# Altium PCB PCB_all.PcbDoc (part 3 of 5)
Units mm, origin at the board's own origin, x right, y up, seen from the top; angles counter-clockwise.
Board outline 345 x 232.5 mm, 2 copper layers (Top Layer, Bottom Layer); 484 components, 419 nets, 1569 pads, 736 vias.
Unrouted connection lines stored in the file: 51.
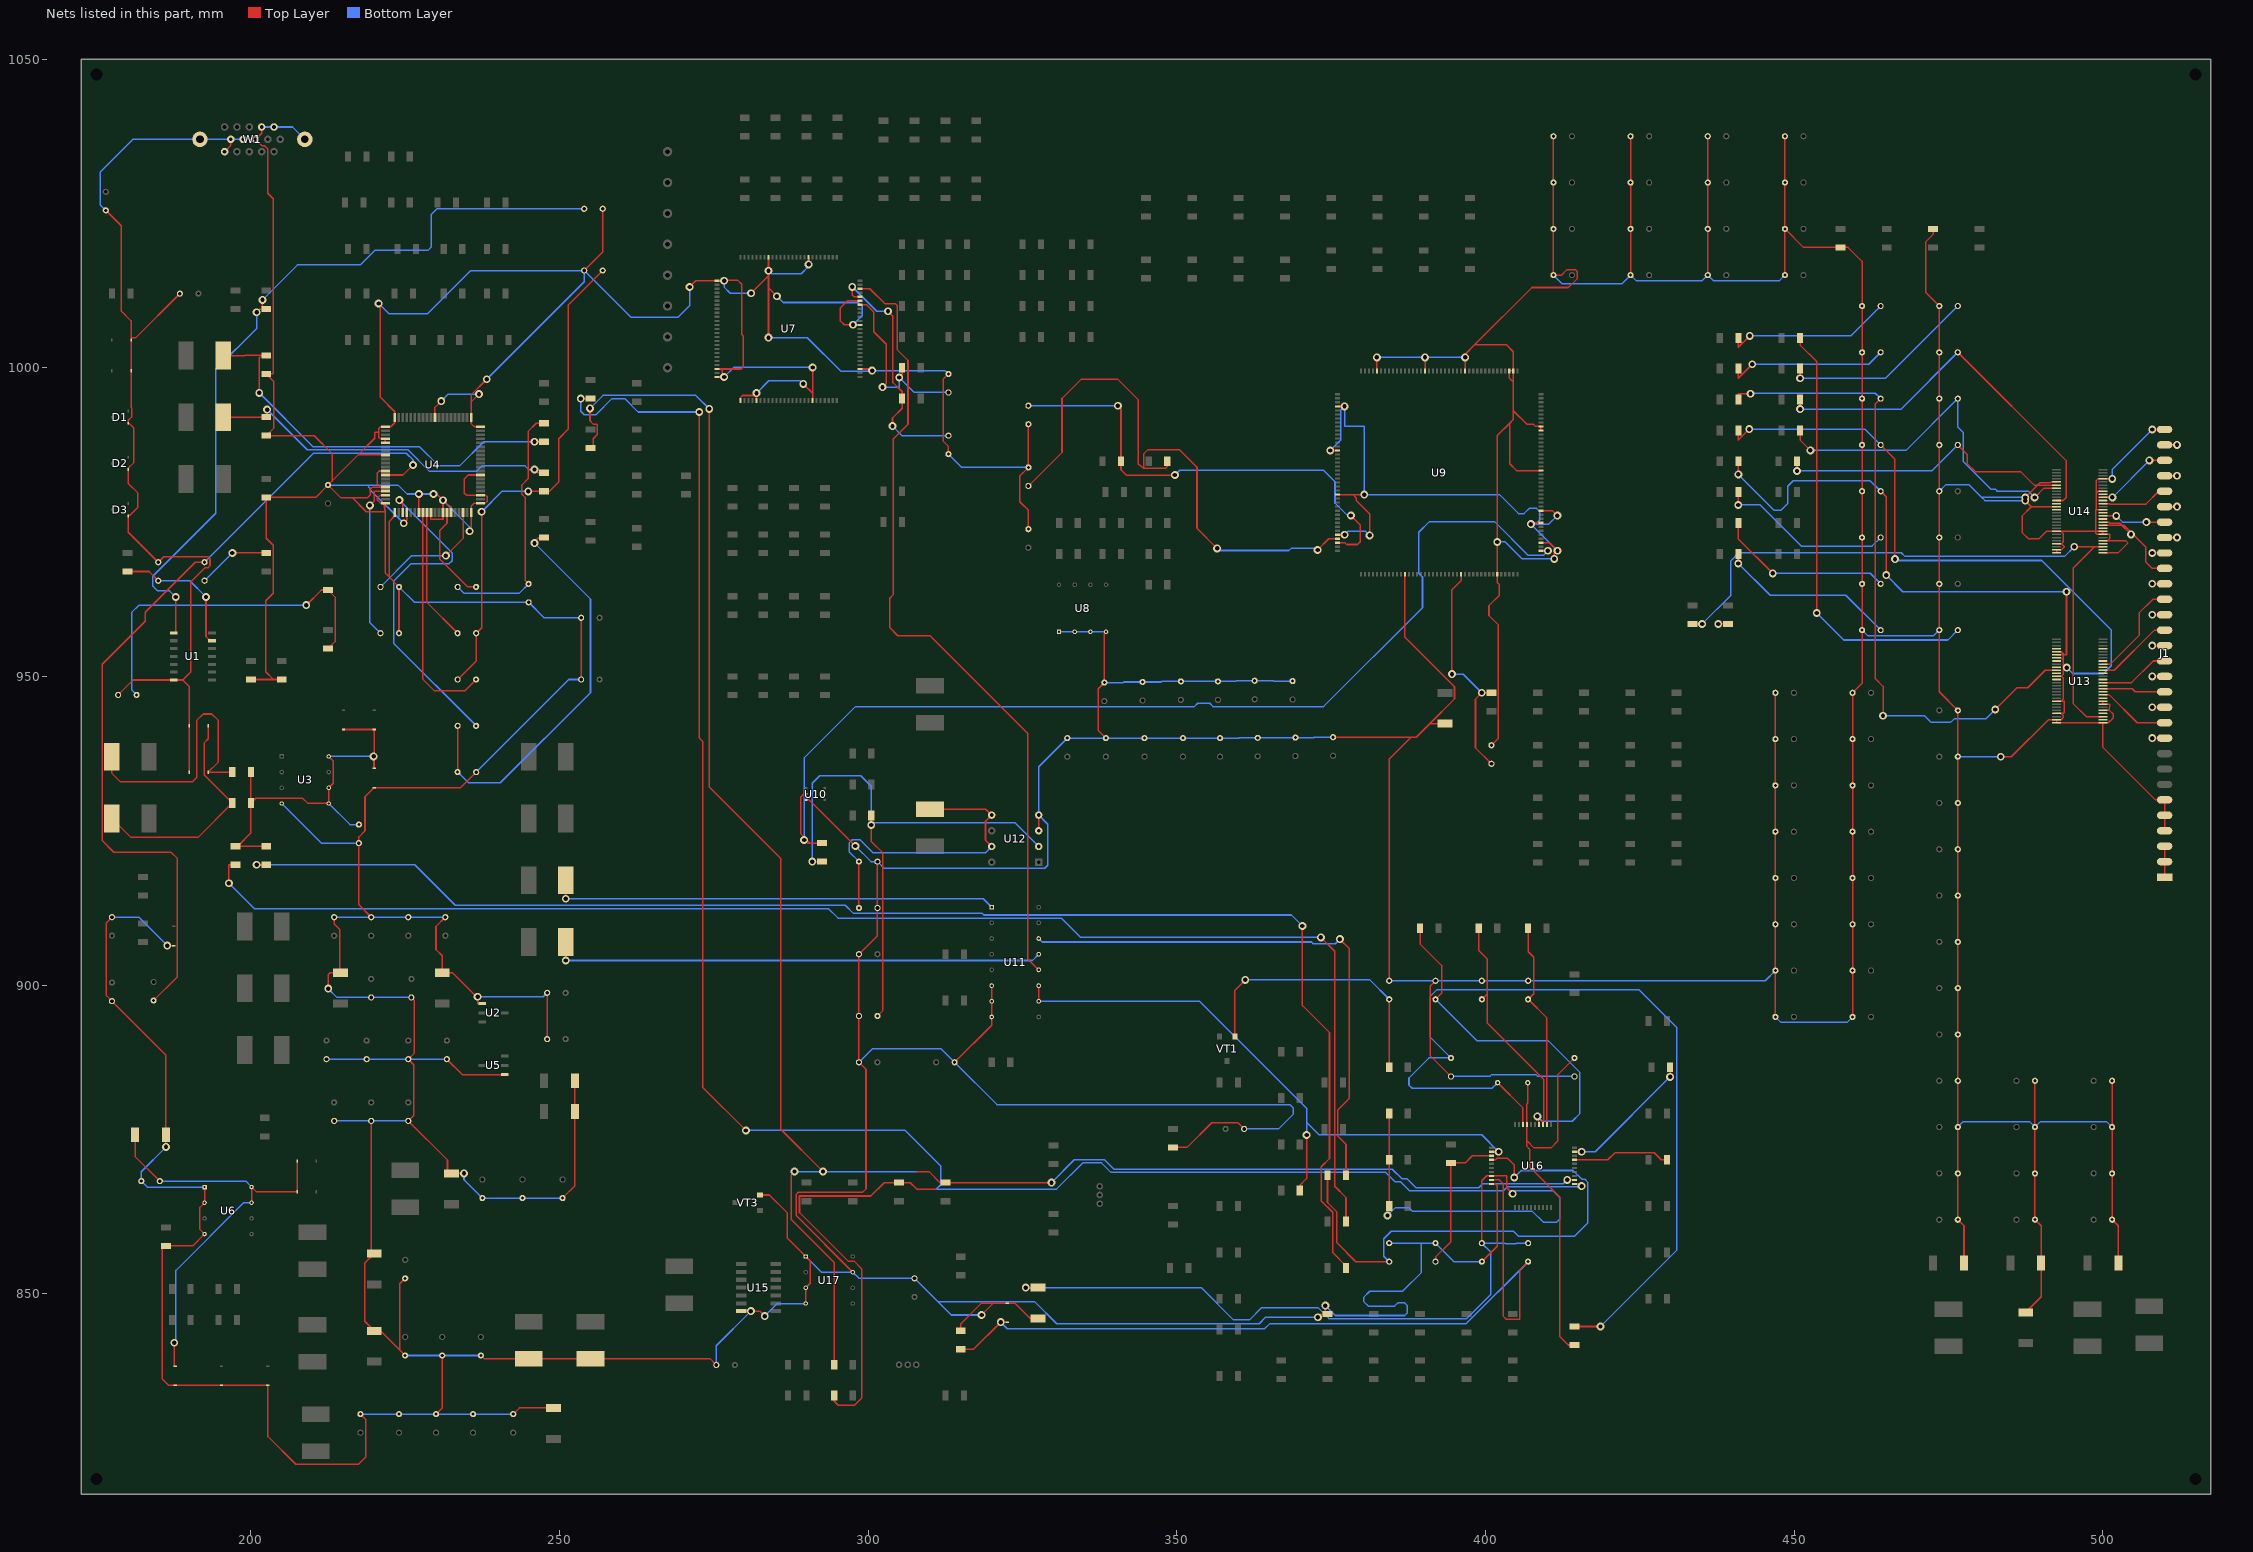
[diagram p3: the nets of this part, all layers, seen from the top]

## Via types
v1: diameter 1.27, hole 0.711, Top Layer to Bottom Layer, 736 vias

## Nets (pads, with @x,y where several pads share a name; then routed paths per layer and width w, separated by ;. In a path a pad name is that pad's centre, name@x,y a point inside that pad or via, vN(x,y) a via of type N, cw(c..) or ccw(c..) an arc to the next point about the centre after c; other vN are vias at no path point) (continued)
GA3: C120.2 R149.1 U14.6 | length 48.9
  Top Layer w0.25: v1(450.444,983.285) 450.45,983.291 R149.1@450.45,984.85 ; C120.2@476.5,987.5 478.003,985.997 478.003,984.504 479.323,983.183 486.664,983.183 488.847,981 U14.6@492.5,981
  Bottom Layer w0.25: v1(450.444,983.285) 472.285,983.285 C120.2@476.5,987.5
GA4: C118.2 R148.1 U14.7 | length 60
  Top Layer w0.25: R148.1@450.95,989.85 450.95,988.29 v1(452.628,986.612) ; v1(488.95,978.992) 490.474,980.516 491.566,980.516 491.582,980.5 U14.7@492.5,980.5
  Bottom Layer w0.25: v1(452.628,986.612) 468.112,986.612 C118.2@476.5,995 476.5,990.385 477.393,989.492 477.393,984.81 481.895,980.308 482.603,980.308 482.905,980.006 487.936,980.006 v1(488.95,978.992)
GA5: C115.2 R147.1 U14.11 | length 63.5
  Top Layer w0.25: v1(450.95,993.292) R147.1@450.95,994.85 ; C115.2@476.5,1002.5 494.102,984.898 494.102,979.029 493.573,978.5 U14.11@492.5,978.5
  Bottom Layer w0.25: v1(450.95,993.292) 467.292,993.292 C115.2@476.5,1002.5
GA6: C112.2 R146.1 U14.12 | length 32
  Top Layer w0.25: v1(450.95,998.296) R146.1@450.95,999.85
  Bottom Layer w0.25: v1(450.95,998.296) 464.796,998.296 C112.2@476.5,1010
GA7: C109.2 R145.1 U14.14 | length 71
  Top Layer w0.25: R145.1@450.95,1004.85 450.95,1003.706 453.644,1001.012 v1(453.644,960.272)
  Bottom Layer w0.25: v1(453.644,960.272) 458.013,955.904 474.904,955.904 C109.2@476.5,957.5
GB0: C106.2 R144.1 U13.8 | length 29.1
  Top Layer w0.25: v1(440.944,968.299) 440.95,968.305 R144.1@440.95,969.85
  Bottom Layer w0.25: v1(440.944,968.299) 446.1,963.143 458.357,963.143 C106.2@464,957.5
GB1: C103.2 R143.1 U13.10 | length 28.6
  Top Layer w0.25: R143.1@440.95,974.85 440.95,972.267 v1(446.519,966.699)
  Bottom Layer w0.25: v1(446.519,966.699) 462.301,966.699 C103.2@464,965
GB2: C100.2 R142.1 U13.4 | length 28.5
  Top Layer w0.25: v1(440.944,977.773) 440.95,977.779 R142.1@440.95,979.85
  Bottom Layer w0.25: v1(440.944,977.773) 444.5,977.773 451.155,971.118 462.618,971.118 C100.2@464,972.5
GB3: C96.2 R141.1 U13.6 | length 88
  Top Layer w0.25: v1(440.95,982.72) R141.1@440.95,984.85 ; C96.2@464,980 464.896,979.104 v1(464.896,966.419) ; U13.6@492.5,953.5 494.106,953.5 v1(494.106,963.727)
  Bottom Layer w0.25: v1(440.95,982.72) 446.786,976.884 447.802,976.884 448.945,978.027 448.945,980.796 449.859,981.71 462.29,981.71 C96.2@464,980 ; v1(464.896,966.419) 467.589,963.727 v1(494.106,963.727)
GB4: C92.2 R140.1 U13.7 | length 102.3
  Top Layer w0.25: R140.1@440.95,989.85 440.95,988.295 v1(442.722,990.067) ; C92.2@464,987.5 466.319,985.181 v1(466.319,969.01) ; U13.7@492.5,953 493.268,953 493.598,952.67 493.598,951.992 v1(494.157,951.433)
  Bottom Layer w0.25: v1(442.722,990.067) 461.433,990.067 C92.2@464,987.5 ; v1(466.319,969.01) 466.547,968.781 490.093,968.781 501.371,957.504 501.371,951.713 500.132,950.474 495.116,950.474 v1(494.157,951.433)
GB5: C87.2 R139.1 U13.11 | length 108.7
  Top Layer w0.25: R139.1@440.95,994.85 440.95,995.782 v1(442.925,995.782) ; C87.2@464,995 463.118,994.118 463.118,949.655 464.388,948.385 v1(464.388,943.635) ; v1(482.564,944.641) 486.1,948.177 487.843,948.177 490.666,951 U13.11@492.5,951
  Bottom Layer w0.25: v1(442.925,995.782) 443.027,995.883 463.117,995.883 C87.2@464,995 ; v1(464.388,943.635) 471.094,943.635 472.117,942.613 475.387,942.613 475.891,943.117 481.04,943.117 v1(482.564,944.641)
GB6: C83.2 R138.1 U13.12 | length 26.3
  Top Layer w0.25: R138.1@440.95,999.85 440.95,998.302 v1(443.205,1000.557)
  Bottom Layer w0.25: v1(443.205,1000.557) 462.057,1000.557 C83.2@464,1002.5
GB7: C79.2 R137.1 U13.14 | length 27.4
  Top Layer w0.25: R137.1@440.95,1004.85 440.95,1003.306 v1(442.798,1005.154)
  Bottom Layer w0.25: v1(442.798,1005.154) 459.154,1005.154 C79.2@464,1010
GND: C1.2 C2.2 C3.2 C4.2 C5.2 C6.2 C7.2 C8.2 C9.2 C10.2 C11.2 C12.2 C13.2 C14.2 C15.2 C17.2 C18.2 C19.2 C25.1 C26.2 C27.1 C28.2 C29.1 C30.2 C31.2 C32.2 C33.2 C34.2 C35.2 C36.2 C37.2 C38.2 C39.2 C40.2 C41.2 C42.2 C43.2 C44.1 C45.1 C46.1 C47.1 C48.1 C49.1 C50.1 C51.1 C52.2 C53.1 C54.1 C55.1 C56.1 C57.2 C58.1 C59.1 C60.1 C61.1 C62.1 C63.1 C64.2 C65.1 C66.1 C67.1 C68.1 C69.1 C70.1 C71.1 C72.1 C73.1 C74.1 C75.1 C76.1 C77.1 C78.1 C79.1 C80.1 C81.1 C82.1 C83.1 C84.1 C85.1 C86.1 C87.1 C88.1 C89.1 C90.1 C91.1 C92.1 C93.1 C94.1 C95.1 C96.1 C97.1 C98.1 C99.1 C100.1 C101.1 C102.1 C103.1 C104.1 C105.1 C106.1 C107.1 C108.1 C109.1 C110.1 C111.1 C112.1 C113.1 C114.1 C115.1 C116.1 C117.1 C118.1 C119.1 C120.1 C121.1 C122.1 C123.1 C124.1 C125.1 C126.1 C127.1 C128.2 C129.2 C130.1 C131.2 C132.2 C133.2 C134.2 C135.2 C136.2 C137.2 C138.1 C139.1 C140.1 C141.1 C142.1 C143.1 C144.1 C145.1 C146.1 C147.1 C148.1 C149.1 C150.1 C151.1 C152.1 C153.1 C154.1 C155.1 C156.1 C157.1 C158.2 C159.1 C160.2 C161.2 C162.1 C163.2 C164.2 C165.1 C166.2 C168.2 C169.2 C170.2 C171.2 C172.1 D1.1 D2.1 D3.1 D8.1 J1.4 J1.5 J1.6 J1.30 L16.1 L17.1 R3.1 R5.1 R15.1 R16.1 R17.1 R49.1 R178.1 R180.1 R204.1 R205.1 R218.1 U1.7 U2.1 U3.4 U4.1 U4.10 U4.20 U4.21 U4.24 U4.25 U4.28 U4.32 U4.36 U4.38 U4.40 U4.41 U4.44 U4.47 U4.50 U4.53 U4.55 U4.60 U4.61 U4.63 U4.68 U4.80 U5.1 U6.1 U6.2 U6.4 U7.1 U7.5 U7.19 U7.28 U7.39 U7.45 U7.58 U7.68 U7.76 U7.98 U7.100 U8.1 U8.2 U8.3 U8.4 U9.12 U9.35 U9.43 U9.48 U9.51 U9.61 U9.71 U9.72 U9.82 U9.83 U9.94 U9.104 U9.116 U9.124 U9.135 U9.146 U9.156 U10.3 U11.6 U11.7 U11.8 U12.3 U12.4 U13.5 U13.13 U13.21 U13.25 U13.27 U13.28 U13.29 U13.33 U13.35 U13.36 U13.43 U13.49 U13.53 U14.5 U14.13 U14.21 U14.25 U14.27 U14.28 U14.29 U14.33 U14.35 U14.36 U14.43 U14.49 U14.53 U15.7 U16.20 U17.1 U17.3 U17.4 U17.7 VT3.2 W1.4 W1.5 W1.6 W1.7 W1.8 W1.11 W1.16 W1.17 ZD1.1 ZD2.1 ZD3.1 ZD4.1 ZD5.1 ZD6.1 ZD7.1 ZD8.1 ZD9.1 | length 3242.3
  Top Layer w0.25: C172.1@176.5,1025.5 178.994,1023.006 178.994,1009.193 180.6,1007.587 180.6,1004.824 ; C5.2@177.5,911 176.606,910.106 176.606,898.294 C13.2@177.5,897.4 186.25,888.65 C52.2@186.25,875.75 186.25,873.794 v1(186.258,873.785) ; C11.2@178.5,947 180.92,949.42 U1.7@187.5,949.42 188.976,949.42 ; v1(186.461,906.399) v1(186.461,906.399) ZD4.1@187.5,906.4 ; C10.2@188.5,1012 181.324,1004.824 180.6,1004.824 ; ZD3.1@190,934.5 ZD5.1@190,942 190,948.396 188.976,949.42 ; U6.1@192.5,867.29 U6.2@192.5,864.75 191.745,863.995 191.745,860.425 U6.4@192.5,859.67 190.58,857.75 R49.1@186.25,857.75 185.674,857.75 185.674,836.168 186.692,835.15 ZD9.1@187.75,835.15 ZD8.1@195.25,835.15 ZD7.1@202.75,835.15 202.768,835.15 202.768,826.872 207.264,822.376 217.424,822.376 218.643,823.595 218.643,829.607 C54.1@217.75,830.5 ; W1.11@195.75,1035 196.75,1036 W1.6@196.75,1037 ; R3.1@200,949.5 203.66,949.5 ; W1.4@201.75,1039 201.75,1038 W1.8@200.75,1037 201.76,1035.99 202.184,1035.99 202.743,1035.431 202.743,1028.268 203.632,1027.379 203.632,999 R15.1@202.5,999 203.68,997.82 203.68,990.18 R16.1@202.5,989 210.261,989 213.157,986.104 213.157,981.657 ; R5.1@205,949.5 203.66,949.5 ; v1(212.547,899.422) 212.547,901.7 212.847,902 C14.2@214.401,902 ; C1.2@213.5,911 213.5,909.917 214.401,909.015 C14.2@214.401,902 ; C14.2@214.5,902 C14.2@214.401,902 ; C28.2@219.5,878 219.5,856.5 C41.2@220,856.5 218.465,854.965 218.465,845.535 C42.2@220,844 221,844 224.104,840.896 ; C2.2@219.5,911 217.5,913 C15.2@217.5,923 217.5,924.001 218.491,924.992 218.491,930.491 ZD6.1@220,932 234,932 C19.2@236.5,934.5 ; v1(220.701,1010.412) 220.98,1010.133 220.98,995.231 223.325,992.886 U4.20@223.325,991.972 223.325,991.108 222.642,990.425 U4.21@221.778,990.425 220.98,990.425 220.701,990.146 220.701,989.584 ; U4.40@221.778,978.075 U4.40@221.564,978.075 ; U4.38@221.778,979.375 220.98,979.375 220.472,978.867 220.472,978.583 220.98,978.075 U4.40@221.564,978.075 ; U4.36@221.778,980.675 220.98,980.675 ; U4.32@221.778,983.275 220.792,983.275 220.472,982.955 220.472,981.183 220.98,980.675 ; U4.28@221.778,985.875 217.375,985.875 ; U4.25@221.778,987.825 U4.24@221.778,988.475 220.98,988.475 220.701,988.754 220.701,989.584 ; U4.41@223.325,976.528 223.325,976.02 222.453,975.149 222.453,966.047 ; C29.1@224,957 C27.1@224,964.5 222.453,966.047 ; v1(224.765,974.801) 225.275,975.312 U4.44@225.275,976.528 ; C45.1@225,840 224.104,840.896 ; C44.1@225,852.5 224.104,851.604 224.104,840.896 ; C9.2@226,898 226.492,897.508 226.492,888.992 C32.2@225.5,888 226.39,887.11 226.39,878.89 C26.2@225.5,878 231.851,871.649 231.851,869.5 C57.2@232.5,869.5 v1(234.523,869.5) ; U4.47@227.225,976.528 v1(227.225,979.551) ; U4.50@229.175,976.528 229.175,975.436 231.06,975.436 231.125,975.501 U4.53@231.125,976.528 v1(231.125,978.532) ; v1(229.591,979.551) 230.106,979.551 v1(231.125,978.532) ; U4.10@229.825,991.972 229.825,993.578 v1(230.835,994.588) ; C51.1@230,830.5 231,831.5 C47.1@231,840 ; C4.2@231.5,911 229.99,909.49 229.99,905.746 231,904.736 C6.2@231,902 232.664,902 v1@236.728,897.936 ; C31.2@231.75,888 234.25,885.5 U5.1@241.1,885.5 ; U4.55@232.425,976.528 232.425,977.504 231.645,978.012 v1(231.125,978.532) ; v1(235.436,973.506) 235.675,973.745 U4.60@235.675,976.528 235.675,977.57 236.18,978.075 U4.61@237.222,978.075 237.998,978.075 238.281,978.358 238.281,979.092 237.998,979.375 U4.63@237.222,979.375 234.874,979.375 234.571,979.678 234.571,981.991 235.205,982.625 U4.68@237.222,982.625 ; v1(236.728,898.119) v1@236.728,897.936 ; v1(236.957,995.731) 235.675,994.449 ; U4.80@237.222,990.425 236.22,990.425 235.675,990.97 U4.1@235.675,991.972 235.675,994.449 ; C50.1@237.25,840 237.75,839.5 L16.1@245,839.5 L17.1@255,839.5 274.36,839.5 C158.2@275.4,838.46 ; U2.1@237.5,897 236.728,897 v1@236.728,897.936 ; v1(238.215,998.144) 235.675,995.604 235.675,994.449 ; C46.1@242.5,830.5 243.5,831.5 C43.2@249,831.5 ; C38.2@248,891.25 C36.2@248,898.75 ; C60.1@250.5,865.5 252.5,867.5 C35.2@252.5,879.5 C40.2@252.5,884.5 ; C39.2@253.5,949.5 C37.2@253.5,959.5 ; C18.2@254,1015.75 257,1018.75 C8.2@257,1025.75 ; v1(271.064,1013.084) 272.08,1014.1 U7.76@275.5,1014.1 v1@276.657,1014.1 ; U7.100@275.5,998.5 275.921,998.5 ; U7.98@275.5,999.8 276.093,999.8 ; v1(276.657,998.499) 275.921,998.5 ; v1(276.657,1014.095) v1@276.657,1014.1 ; U7.1@279.3,994.7 279.3,995.172 279.636,995.508 v1@281.9,995.508 ; U15.7@279.4,847.19 v1@280.999,847.19 ; v1(281,847.192) v1@280.999,847.19 ; v1(281.026,1012.063) 283.85,1014.887 ; U7.5@281.9,994.7 v1@281.9,995.508 ; v1(281.9,995.883) v1@281.9,995.508 ; VT3.2@282.5,866 283.985,866 286.922,863.063 286.922,858.998 U17.1@289.88,856.04 290.627,855.293 290.627,851.707 U17.3@289.88,850.96 U17.4@289.88,848.42 ; v1(283.246,846.388) 282.444,847.19 v1@280.999,847.19 ; v1(283.85,1004.875) 283.85,1012.947 ; U7.68@283.85,1017.9 283.85,1016.514 v1(283.85,1015.721) 283.85,1014.887 ; v1(285.215,1011.582) 283.85,1012.947 ; v1(289.476,997.384) 291,995.86 ; U10.3@290,930 290.445,930 v1(297.917,922.528) ; v1(290.347,1016.737) 290.35,1016.739 U7.58@290.35,1017.9 ; U7.19@291,994.7 291,995.86 ; v1(291,1000.049) 291,995.86 ; U17.7@297.5,853.5 288.371,862.629 288.371,866.14 288.67,866.439 299.094,866.439 299.644,866.989 299.644,886.356 C128.2@298.5,887.5 C129.2@298.5,895 C131.2@298.5,905 301.5,908 C132.2@301.5,912.5 C133.2@301.5,920 ; v1(297.536,1006.958) v1@297.543,1006.95 ; U7.28@298.7,999.8 300.379,999.8 v1(300.636,999.543) v1@300.53,999.436 ; U7.39@298.7,1006.95 v1@297.543,1006.95 ; U7.45@298.7,1010.85 296.642,1010.85 295.508,1009.716 295.508,1007.553 296.111,1006.95 v1@297.543,1006.95 ; C55.1@313,986 313,987.242 312.121,988.121 312.121,998.121 C56.1@313,999 ; C130.1@314,887.5 320,893.5 U11.8@320,894.84 U11.7@320,897.38 U11.6@320,899.92 ; R205.1@315,844 314.985,844 314.985,845.122 318.364,848.5 320.3,848.5 ; v1(318.364,846.564) 320.3,848.5 ; C62.1@325.95,973.85 325.95,976.918 324.567,978.301 324.567,982.467 C61.1@325.95,983.85 C63.1@325.95,990.85 ; C163.2@327.5,846 326.248,846 323.748,848.5 D8.1@322.5,848.5 320.3,848.5 ; U12.3@327.62,925 U12.4@327.62,927.54 ; C73.1@338.5,940 337.261,941.239 337.261,948.011 C98.1@338.25,949 338.25,956.95 U8.4@338.53,957.23 ; R218.1@349.4,873.7 351.638,873.7 355.635,877.697 359.903,877.697 C169.2@360.9,876.7 ; v1(372.847,846.192) 373.355,846.7 R204.1@374.066,846.7 ; v1(374.066,848.076) R204.1@374.066,846.7 ; R204.1@374.4,846.7 R204.1@374.066,846.7 ; v1(374.838,986.6) U9.135@376,986.6 ; C65.1@375.3,940.15 377.5,940.15 387.944,940.15 ; U9.156@376,972.95 v1(377.165,972.95) ; U9.146@376,979.45 378.532,979.45 ; U9.124@376,993.75 v1(377.162,993.75) ; v1(380.365,979.45) 378.532,979.45 ; v1(381.229,972.845) 381.229,976.325 379.066,978.488 379.066,978.916 378.532,979.45 ; U9.116@382.4,999.5 v1(382.4,1001.676) ; C170.2@384.4,900.7 384.4,936.606 387.944,940.15 ; U9.12@386.95,966.55 386.95,956.359 394.975,948.334 394.975,946.353 390.972,942.35 ; U9.104@390.2,999.5 v1(390.2,1001.676) ; C164.2@391.9,900.7 391.008,899.808 391.008,888.592 C161.2@394.4,885.2 ; C64.2@393.45,942.35 390.972,942.35 ; U9.94@396.7,999.5 v1(396.7,1001.676) 396.7,1002.185 398.223,1003.708 ; C165.1@399.4,855.2 401.887,857.687 401.887,867.478 401.565,867.8 U16.20@400.95,867.8 ; C90.1@400.95,938.85 402.082,939.982 402.082,958.342 400.558,959.866 400.558,961.468 402.258,963.168 402.258,964.868 401.9,965.226 U9.35@401.9,966.55 v1(401.9,971.781) 401.9,989.009 403.911,991.02 ; v1(407.34,974.674) 407.566,974.9 408.127,974.9 ; 408.127,974.674 408.127,974.9 ; U9.43@408.95,971.65 410.336,971.65 411.128,970.858 v1@411.128,970.356 ; U9.48@408.95,974.9 408.127,974.9 ; U9.51@408.95,976.85 410.844,976.85 v1(411.636,976.058) ; U9.61@408.95,983.35 405.014,983.35 403.911,984.453 403.911,991.02 ; U9.71@408.95,989.85 U9.72@408.95,990.5 408.114,990.5 407.766,990.848 406.702,990.848 404.5,993.05 ; C70.1@411,1037.5 C72.1@411,1030 C74.1@411,1022.5 C76.1@411,1015 412.309,1015 413.207,1015.898 414.528,1015.898 414.884,1015.543 414.884,1014.476 413.41,1013.003 407.518,1013.003 398.223,1003.708 ; v1(411.128,969.035) v1@411.128,970.356 ; v1(411.658,970.356) v1@411.128,970.356 ; C91.1@423.5,1015 C86.1@423.5,1022.5 C82.1@423.5,1030 C78.1@423.5,1037.5 ; C105.1@436,1015 C102.1@436,1022.5 C99.1@436,1030 C95.1@436,1037.5 ; C107.1@446.95,894.85 C104.1@446.95,902.35 C101.1@446.95,909.85 C97.1@446.95,917.35 C93.1@446.95,924.85 C88.1@446.95,932.35 C84.1@446.95,939.85 C80.1@446.95,947.35 ; C117.1@448.5,1015 C114.1@448.5,1022.5 ; C108.1@448.5,1037.5 C111.1@448.5,1030 C114.1@448.5,1022.5 ; C127.1@459.45,894.85 C125.1@459.45,902.35 C123.1@459.45,909.85 C121.1@459.45,917.35 C119.1@459.45,924.85 C116.1@459.45,932.35 C113.1@459.45,939.85 C110.1@459.45,947.35 461,948.9 C106.1@461,957.5 C103.1@461,965 C100.1@461,972.5 C96.1@461,980 C92.1@461,987.5 C87.1@461,995 C83.1@461,1002.5 C79.1@461,1010 461,1017.224 458.724,1019.5 R180.1@457.5,1019.5 451.5,1019.5 C114.1@448.5,1022.5 ; R178.1@472.5,1022.5 472.5,1021.597 471.272,1020.369 471.272,1012.228 C112.1@473.5,1010 C115.1@473.5,1002.5 C118.1@473.5,995 C120.1@473.5,987.5 C122.1@473.5,980 C124.1@473.5,972.5 C126.1@473.5,965 C109.1@473.5,957.5 473.5,947.5 C157.1@476.5,944.5 C156.1@476.5,937 C155.1@476.5,929.5 C154.1@476.5,922 C153.1@476.5,914.5 C152.1@476.5,907 C151.1@476.5,899.5 C150.1@476.5,892 C147.1@476.5,884.5 C144.1@476.5,877 C141.1@476.5,869.5 C138.1@476.5,862 477.5,861 C135.2@477.5,855 ; v1(483.464,936.981) 485.17,936.981 491.189,943 U13.27@492.5,943 ; v1(487.426,978.484) 488.41,977.5 ; v1(487.426,978.992) 489.839,981.405 491.566,981.405 491.661,981.5 U14.5@492.5,981.5 ; C134.2@487.5,847 490,849.5 C136.2@490,855 490,861 C139.1@489,862 C142.1@489,869.5 C145.1@489,877 C148.1@489,884.5 ; U13.25@492.5,944 493.268,944 ; U13.21@492.5,946 493.268,946 ; U13.13@492.5,950 493.268,950 ; U13.5@492.5,954 493.268,954 493.598,953.67 493.598,950.33 493.268,950 ; U14.28@492.5,970 U14.27@492.5,970.5 493.268,970.5 493.741,970.973 493.741,971.042 493.283,971.5 ; U14.25@492.5,971.5 493.283,971.5 ; U14.13@492.5,977.5 488.41,977.5 ; U13.29@500,942.5 500.888,942.5 501.701,943.313 501.701,943.864 501.065,944.5 ; U13.33@500,944.5 501.065,944.5 ; U13.36@500,946 U13.35@500,945.5 501.091,945.5 501.065,944.5 ; U14.29@500,970 502.444,970 504.063,971.619 503.682,972 500.779,972 ; U14.33@500,972 500.779,972 ; U14.43@500,977 498.907,977 ; U14.49@500,980 499.229,980 498.907,979.678 ; C149.1@501.5,884.5 C146.1@501.5,877 C143.1@501.5,869.5 C140.1@501.5,862 502.5,861 C137.2@502.5,855 ; v1(501.523,981.989) 501.512,982 U14.53@500,982 499.197,982 498.907,981.71 498.907,979.678 ; v1(508,990) J1.30@510,990 ; J1.4@510,925 J1.5@510,927.5 J1.6@510,930 508.504,930 499.999,938.505 U13.29@500,942.5 U13.28@492.5,942.5 U13.27@492.5,943 ; 180.6,1004.824 ZD1.1@180.6,1004.5 ZD2.1@180.6,999.5 180.6,993.566 180.67,993.496 180.67,992.013 180.15,991.493 D1.1@180.15,991 180.15,990.93 180.34,990.93 181,990.27 181,984.592 180.15,983.742 D2.1@180.15,983.5 180.15,981.253 181.712,979.691 181.712,977.392 180.391,976.071 180.15,976.071 D3.1@180.15,976 180.15,973.35 C7.2@185,968.5 185.879,969.379 193.04,969.379 193.379,969.04 193.379,967.96 193.04,967.621 192.589,967.621 190.277,965.309 190.277,950.721 188.976,949.42 ; 203.66,949.5 202.413,950.747 202.413,962.254 203.632,963.473 203.632,971.245 202.489,972.388 202.489,979 R17.1@202.5,979 210.5,979 C25.1@212.5,981 ; C25.1@212.5,981 214.531,978.969 216.406,978.969 ; C25.1@212.5,981 213.157,981.657 ; 213.157,981.657 217.375,985.875 ; 216.406,978.969 218.948,978.969 219.354,979.375 219.354,980.319 219.71,980.675 220.98,980.675 ; 216.406,978.969 218.692,976.683 221.767,976.683 ; 217.375,985.875 220.066,988.566 220.066,989.584 220.701,989.584 ; U4.40@221.564,978.075 221.569,978.044 221.767,976.683 ; 221.767,976.683 221.767,966.733 222.453,966.047 ; 275.921,998.5 276.352,998.931 276.352,999.541 276.093,999.8 ; 276.093,999.8 279.424,999.8 279.724,1000.1 279.724,1005.198 279.5,1005.422 279.5,1013.536 278.892,1014.144 276.657,1014.144 v1@276.657,1014.1 ; 283.85,1012.947 283.85,1014.887 ; 387.944,940.15 388.772,940.15 390.972,942.35 ; 398.223,1003.708 403.401,1003.708 404.5,1002.609 U9.82@404.5,999.5 ; 403.911,991.02 403.911,991.032 404.495,991.616 404.495,997.687 403.85,998.332 U9.83@403.85,999.5 U9.82@404.5,999.5 ; 403.911,991.02 404.5,991.609 404.5,993.05 ; 404.5,993.05 U9.82@404.5,999.5 ; 488.41,977.5 486.911,976.001 486.911,973.328 487.953,972.287 489.667,972.287 490.88,973.5 U14.21@492.5,973.5 493.268,973.5 ; U13.27@492.5,943 493.268,943 493.598,943.33 493.598,943.67 493.268,944 ; 493.268,944 493.63,944 493.776,944.146 493.776,945.975 493.751,946 493.268,946 ; 493.268,946 493.598,946.33 493.598,949.706 493.304,950 493.268,950 ; 493.268,973.5 498.856,973.5 ; 493.268,973.5 493.598,973.17 493.598,971.804 493.294,971.5 493.283,971.5 ; 498.856,973.5 498.856,976.988 498.868,977 498.907,977 ; 498.856,973.5 498.856,973.178 499.034,973 U14.35@500,973 ; 498.856,973.5 U14.36@500,973.5 U14.35@500,973 ; 498.907,977 498.907,979.678 ; U14.35@500,973 501.091,973 501.091,972.312 500.779,972
  Bottom Layer w0.25: C172.1@176.5,1025.5 175.616,1026.384 175.616,1031.697 180.918,1037 W1.17@191.75,1037 W1.6@196.75,1037 W1.7@198.75,1037 W1.8@200.75,1037 ; C5.2@177.5,911 181.86,911 v1(186.461,906.399) ; v1(186.258,873.785) 182.25,869.777 C49.1@182.25,868.25 183.21,867.29 U6.1@192.5,867.29 ; W1.4@201.75,1039 W1.5@203.75,1039 206.75,1039 W1.16@208.75,1037 ; U3.4@205,929.42 211.42,923 C15.2@217.5,923 ; C34.2@212.25,888 C33.2@218.75,888 C32.2@225.5,888 C31.2@231.75,888 ; C25.1@212.5,981 218.794,981 ; v1(212.547,899.422) 213.97,898 C12.2@219.5,898 C9.2@226,898 ; C30.2@213.5,878 C28.2@219.5,878 C26.2@225.5,878 ; C1.2@213.5,911 C2.2@219.5,911 C3.2@225.5,911 C4.2@231.5,911 ; C54.1@217.75,830.5 C53.1@224,830.5 C51.1@230,830.5 C48.1@236,830.5 C46.1@242.5,830.5 ; v1(220.701,1010.412) 222.377,1008.736 228.6,1008.736 235.614,1015.75 C18.2@254,1015.75 ; C27.1@224,964.5 226.5,962 C17.2@245,962 247.5,959.5 C37.2@253.5,959.5 ; v1(224.765,974.801) 219.354,980.212 219.354,980.44 218.794,981 ; C45.1@225,840 C47.1@231,840 C50.1@237.25,840 ; v1(229.591,979.551) v1(227.225,979.551) 225.301,979.551 223.852,981 218.794,981 ; v1(230.835,994.588) 231.978,995.731 v1(236.957,995.731) ; v1(231.125,978.532) 235.436,974.222 v1(235.436,973.506) ; v1(234.523,869.5) 234.523,868.477 C58.1@237.5,865.5 C59.1@244,865.5 C60.1@250.5,865.5 ; C19.2@236.5,934.5 251.5,949.5 C39.2@253.5,949.5 ; v1(236.728,898.119) 247.369,898.119 C36.2@248,898.75 ; v1(238.215,998.144) 254,1013.929 C18.2@254,1015.75 ; v1(271.064,1013.084) 271.064,1010.026 269.24,1008.202 261.548,1008.202 C18.2@254,1015.75 ; C158.2@275.4,838.46 275.4,841.591 v1(281,847.192) ; v1(276.657,998.499) 278.206,1000.049 v1(291,1000.049) ; v1(276.657,1014.095) 276.657,1013.079 277.673,1012.063 v1(281.026,1012.063) ; v1(281.9,995.883) 283.905,997.888 288.972,997.888 v1(289.476,997.384) ; v1(283.246,846.388) 285.278,848.42 U17.4@289.88,848.42 ; v1(283.85,1004.875) 290.144,1004.875 295.583,999.436 v1@300.53,999.436 ; v1(283.85,1015.721) 284.352,1015.219 289.172,1015.219 290.347,1016.394 v1(290.347,1016.737) ; v1(285.215,1011.582) 286.227,1010.57 298.39,1010.57 299.056,1009.904 299.056,1008.478 v1(297.536,1006.958) ; U17.1@289.88,856.04 292.42,853.5 U17.7@297.5,853.5 298.5,852.5 C171.2@307.5,852.5 311.259,848.741 ; v1(297.917,922.528) 300.445,920 C133.2@301.5,920 302.579,918.921 328.6,918.921 329.103,919.424 329.103,926.057 U12.4@327.62,927.54 327.62,935.37 C75.1@332.25,940 C73.1@338.5,940 C71.1@344.75,940 C69.1@351,940 C68.1@357,940 360.02,940 360.07,940.05 C67.1@363.1,940.05 366.116,940.05 366.166,940.1 C66.1@369.2,940.1 372.212,940.1 372.262,940.15 C65.1@375.3,940.15 ; C128.2@298.5,887.5 300.66,889.66 311.84,889.66 C130.1@314,887.5 320.857,880.643 368.3,880.643 368.884,880.059 368.884,879.119 366.465,876.7 C169.2@360.9,876.7 ; v1(300.636,999.543) 312.457,999.543 C56.1@313,999 ; C55.1@313,986 315.15,983.85 C61.1@325.95,983.85 ; v1(318.364,846.564) 313.436,846.564 311.259,848.741 ; U8.1@330.91,957.23 U8.2@333.45,957.23 U8.3@335.99,957.23 U8.4@338.53,957.23 ; C98.1@338.25,949 341.3,949 341.4,949.1 C94.1@344.45,949.1 347.497,949.1 347.597,949.2 C89.1@350.65,949.2 C85.1@356.65,949.2 359.562,949.2 359.662,949.3 C81.1@362.6,949.3 365.633,949.3 365.683,949.25 C77.1@368.75,949.25 ; v1(372.847,846.192) 364.363,846.192 363.327,845.157 330.533,845.157 326.949,848.741 311.259,848.741 ; v1(374.066,848.076) 375.661,846.48 386.944,846.48 387.299,846.836 387.299,848.106 386.895,848.51 385.773,848.51 385.267,848.004 381,848.004 380.238,848.766 380.238,849.376 381.254,850.392 386.563,850.392 389.611,853.44 389.611,858.2 ; v1(374.838,986.6) 376.577,988.339 376.577,993.165 v1(377.162,993.75) 377.162,990.547 380.365,990.547 v1(380.365,979.45) 402.259,979.45 405.333,976.376 406.248,976.376 407.084,977.212 408.256,977.212 408.813,976.655 408.813,975.36 408.127,974.674 ; v1(377.165,972.95) 377.719,973.505 380.569,973.505 v1(381.229,972.845) ; v1(382.4,1001.676) v1(390.2,1001.676) v1(396.7,1001.676) ; C162.1@384.4,858.2 388.137,858.2 389.611,858.2 ; C170.2@384.4,900.7 C164.2@391.9,900.7 C166.2@399.4,900.7 C168.2@406.9,900.7 445.3,900.7 C104.1@446.95,902.35 ; C161.2@394.4,885.2 400.672,885.2 400.985,885.513 408.153,885.513 408.466,885.2 C160.2@414.4,885.2 ; C165.1@399.4,855.2 394.9,855.2 C159.1@391.9,858.2 389.611,858.2 ; v1(401.9,971.781) 403.198,971.781 405.943,969.035 v1(411.128,969.035) ; C76.1@411,1015 412.383,1013.617 422.117,1013.617 C91.1@423.5,1015 424.38,1014.12 435.12,1014.12 C105.1@436,1015 436.88,1014.12 447.62,1014.12 C117.1@448.5,1015 ; v1(411.636,976.058) 410.252,974.674 408.127,974.674 ; v1(411.658,970.356) v1(407.34,974.674) 408.127,974.674 ; C107.1@446.95,894.85 447.847,893.953 458.553,893.953 C127.1@459.45,894.85 ; C106.1@461,957.5 461.885,956.615 472.615,956.615 C109.1@473.5,957.5 ; C122.1@473.5,980 474.524,981.024 478.358,981.024 480.39,978.992 ; C144.1@476.5,877 477.4,877.9 488.1,877.9 C145.1@489,877 489.9,877.9 500.6,877.9 C146.1@501.5,877 ; C156.1@476.5,937 483.445,937 v1(483.464,936.981) ; v1(487.426,978.484) 480.898,978.484 480.39,978.992 ; v1(487.426,978.992) 480.39,978.992 ; v1(501.523,981.989) 501.523,983.523 v1(508,990)
HP_SENSE: R217.2 U16.37 | length 15.9
  Top Layer w0.25: U16.37@414.4,871.7 419.811,871.7 420.957,872.846 427.33,872.846 428.475,871.7 R217.2@429.4,871.7
HSYNC_D: U7.48 U11.12 | length 129.8
  Top Layer w0.25: U7.48@298.7,1012.8 300.264,1012.8 302.704,1010.36 304.432,1010.36 304.675,1010.117 304.675,1002.968 306.451,1001.192 306.451,990.859 304.022,988.43 304.022,963.203 303.479,962.66 303.479,957.91 304.8,956.589 310.032,956.589 325.846,940.776 325.846,904.234 U11.12@327.62,902.46
HSYNC_IN: R184.1 U11.14 | length 89.6
  Top Layer w0.25: v1(376.403,907.442) 377.927,905.918 377.927,881.634 376.075,879.782 376.075,875.563 377.4,874.238 R184.1@377.4,869.2
  Bottom Layer w0.25: U11.14@327.62,907.54 328.177,906.983 371.805,906.983 372.083,906.706 375.666,906.706 v1(376.403,907.442)
HSYNC_X: R170.1 U9.41 U10.2 | length 174.1
  Top Layer w0.25: v1(289.611,923.508) 290.119,923 290.576,923 ; U10.2@290,930.95 289.56,930.95 289.038,930.428 289.038,924.538 290.576,923 ; R170.1@292.5,923 290.576,923 ; U9.41@408.95,970.35 410.102,970.35 v1(410.108,970.356)
  Bottom Layer w0.25: v1(289.611,923.508) 289.611,936.777 297.942,945.109 352.835,945.109 353.373,945.647 355.317,945.647 355.855,945.109 373.761,945.109 389.788,961.136 389.788,966.114 389.181,966.721 389.181,973.354 390.906,975.079 401.449,975.079 406.883,969.645 409.397,969.645 v1(410.108,970.356)
INPUT_SELECT: R181.1 U11.10 U11.11 U16.12 | length 101.1
  Top Layer w0.25: U11.10@327.62,897.38 U11.11@327.62,899.92 ; R181.1@369.9,866.7 369.9,867.537 371.018,868.655 v1(371.018,875.716) ; U16.12@400.95,873 v1(402.112,873)
  Bottom Layer w0.25: U11.10@327.62,897.38 353.672,897.38 371.018,880.034 371.018,877.765 ; v1(371.018,875.716) 371.018,877.765 ; v1(402.112,873) 399.371,875.741 373.041,875.741 371.018,877.765
LCD_CLK: R130.1 U13.31 U14.31 | length 107.9
  Top Layer w0.25: R130.1@433.5,958.5 v1(435.082,958.5) ; v1(495.36,971) 498.636,971 ; U13.31@500,943.5 497.307,943.5 495.171,945.636 495.171,967.535 498.636,971 ; U14.31@500,971 498.636,971
  Bottom Layer w0.25: v1(435.082,958.5) 439.75,963.168 439.75,968.756 441.018,970.024 467.343,970.024 467.925,969.442 493.801,969.442 v1(495.36,971)
LCD_DE: R129.1 U13.30 U14.30 | length 1.6
  Top Layer w0.25: v1(437.688,958.5) R129.1@439.25,958.5
LCD_VCC: J1.1 J1.2 J1.3 | length 5
  Top Layer w0.25: J1.1@510,917.5 J1.2@510,920 J1.3@510,922.5
LVDS_PD: R213.2 U13.32 U14.32 U16.39 | length 22.1
  Top Layer w0.25: U16.39@414.4,873 415.567,873 v1(415.569,872.998) ; v1(429.9,885.138) v1(429.9,885.144) R213.2@429.9,886.7
  Bottom Layer w0.25: v1(415.569,872.998) 417.754,872.998 v1(429.9,885.144)
MCU_H_IN: L11.2 U11.13 | length 80.1
  Top Layer w0.25: v1(251,903.986) L11.2@251,907
  Bottom Layer w0.25: v1(251,903.986) 326.606,903.986 U11.13@327.62,905
MCU_ISP_SCL: R12.1 R185.1 | length 232.3
  Top Layer w0.25: v1(196.444,916.508) 196.444,919.48 R12.1@197.5,919.5 ; v1(373.329,907.72) 375.571,905.478 375.571,867.417 377.4,865.588 R185.1@377.4,861.7
  Bottom Layer w0.25: v1(196.444,916.508) 200.558,912.393 293.548,912.393 295.088,910.853 331.283,910.853 334.416,907.72 v1(373.329,907.72)
MCU_ISP_SDA: R13.1 R186.1 | length 234.5
  Top Layer w0.25: v1(200.939,919.505) 200.945,919.5 R13.1@202.5,919.5 ; v1(370.332,909.574) 370.332,896.696 374.726,892.302 374.726,871.906 373.38,870.56 373.38,865.048 375.234,863.194 375.234,856.673 377.4,854.507 R186.1@377.4,854.2
  Bottom Layer w0.25: v1(200.939,919.505) 226.543,919.505 233.096,912.952 296.266,912.952 297.612,911.606 318.488,911.606 318.737,911.357 368.549,911.357 v1(370.332,909.574)
MCU_SCL1: R24.1 R230.2 R234.1 U16.32 | length 325.7
  Top Layer w0.25: v1(254.94,993.419) 254.94,991.413 255.524,990.829 256.125,990.829 256.125,989.175 255.448,988.498 255.448,987 R24.1@255,987 ; v1(274.244,993.343) 274.244,932.078 285.826,920.496 285.826,876.656 v1(292.684,869.798) ; v1(288.061,869.798) 287.503,869.239 287.503,862.076 294.5,855.079 R234.1@294.5,838.5 ; 307.905,869.798 309.829,869.798 311.627,868 R230.2@312.5,868 v1(329.698,868) ; v1(413.233,868.451) 413.234,868.45 U16.32@414.4,868.45
  Bottom Layer w0.25: v1(254.94,993.419) 257.03,995.51 272.077,995.51 v1(274.244,993.343) ; v1(288.061,869.798) v1(292.684,869.798) 307.905,869.798 ; v1(329.698,868) 333.39,871.693 338.293,871.693 339.817,870.169 384.901,870.169 386.45,868.62 387.283,868.62 388.716,867.187 398.888,867.187 399.519,867.818 412.6,867.818 v1(413.233,868.451)
MCU_SDA1: R23.1 R229.2 R235.1 U16.31 | length 359.3
  Top Layer w0.25: v1(253.441,995) R23.1@255,995 ; v1(272.644,992.835) 272.644,940.029 273.177,939.495 273.177,883.463 v1(280.187,876.452) ; R235.1@294.5,833.5 294.5,832.6 295.148,831.952 297.79,831.952 298.958,833.12 298.958,854.024 297.688,855.294 296.748,855.294 288.875,863.167 288.875,865.835 300.431,865.835 302.596,868 R229.2@305,868 306.807,868 307.854,866.953 311.023,866.953 ; U16.31@414.4,867.8 415.205,867.8 v1(415.569,867.435)
  Bottom Layer w0.25: v1(253.441,995) 253.441,992.962 254,992.403 255.919,992.403 258.521,995.006 260.553,995.006 262.724,992.835 v1(272.644,992.835) ; v1(280.187,876.452) 305.994,876.452 311.734,870.712 311.734,867.664 311.023,866.953 330.517,866.953 334.753,871.189 337.789,871.189 339.313,869.665 383.829,869.665 385.378,868.116 386.259,868.116 387.692,866.683 402.885,866.683 403.516,867.314 415.448,867.314 v1(415.569,867.435)
MCU_V_IN: L10.2 U11.1 | length 72.6
  Top Layer w0.25: v1(251,913.994) L10.2@251,917
  Bottom Layer w0.25: v1(251,913.994) 318.626,913.994 U11.1@320,912.62
NetC7_1: C7.1 R6.2 U1.13 | length 22.1
  Top Layer w0.25: R6.2@180,967 183.5,967 C7.1@185,965.5 ; v1(192.735,962.863) 192.735,956.462 193.428,955.77 U1.13@193.7,955.77
  Bottom Layer w0.25: C7.1@185,965.5 190.098,965.5 v1(192.735,962.863)
NetC8_1: C8.1 R7.2 U1.1 | length 126.5
  Top Layer w0.25: U1.1@187.5,957.04 187.833,957.04 v1(187.833,962.863) ; v1(200.939,1008.99) 201.45,1009.5 R7.2@201.879,1009.5 ; v1(201.879,1010.996) R7.2@201.879,1009.5 ; R7.2@202.5,1009.5 R7.2@201.879,1009.5
  Bottom Layer w0.25: v1(187.833,962.863) 186.842,963.854 184.912,963.854 184.099,964.667 184.099,966.216 194.31,976.427 194.31,999.744 200.939,1006.373 v1(200.939,1008.99) ; v1(201.879,1010.996) 207.543,1016.66 217.729,1016.66 220.066,1018.997 228.676,1018.997 229.236,1019.557 229.236,1024.84 230.146,1025.75 C8.1@254,1025.75
NetC11_1: C11.1 R11.2 R14.1 | length 57.4
  Top Layer w0.25: v1(208.98,961.544) 211.436,964 R14.1@212.5,964 213.639,962.861 213.639,955.639 R11.2@212.5,954.5
  Bottom Layer w0.25: C11.1@181.5,947 180.736,947.764 180.736,960.417 181.864,961.544 v1(208.98,961.544)
NetC15_1: C15.1 D4.2 D5.2 R9.2 R10.2 R12.2 R13.2 U3.5 U3.6 U3.8 ZD6.2 | length 66.3
  Top Layer w0.25: R12.2@197.5,922.5 R12.2@197.865,922.5 ; R9.2@200,934.5 R10.2@200,929.5 ; R13.2@202.5,922.5 R12.2@197.865,922.5 ; U3.8@212.62,937.04 213.36,936.3 213.36,932.7 U3.6@212.62,931.96 U3.5@212.62,929.42 209.237,929.42 208.382,930.275 200.775,930.275 R10.2@200,929.5 ; D4.2@215,941.4 D5.2@220,941.4 ZD6.2@220,935.1 219.888,935.1 v1(219.888,937.04) ; R12.2@197.865,922.5 200,924.635 R10.2@200,929.5
  Bottom Layer w0.25: U3.5@212.62,929.42 216.04,926 C15.1@217.5,926 ; U3.8@212.62,937.04 v1(219.888,937.04)
NetC16_1: C16.1 C20.1 U4.33 | length 138.3
  Top Layer w0.25: C16.1@184.25,897.5 188.112,901.362 188.112,920.496 187.071,921.537 177.8,921.537 175.92,923.417 175.92,951.963 182.89,958.932 182.89,960.4 190.99,968.5 C20.1@192.5,968.5 ; U4.33@221.778,982.625 224.638,982.625 v1(226.263,984.25)
  Bottom Layer w0.25: C20.1@192.5,968.5 210.151,986.151 225.191,986.151 226.263,985.079 v1(226.263,984.25)
NetC17_1: C17.1 C21.2 R19.2 | length 41.2
  Top Layer w0.25: C17.1@245,965 244.416,965.584 244.416,978.986 243.908,979.494 243.908,981.014 244.907,982.013 244.907,989.686 246.221,991 R19.2@247.5,991
  Bottom Layer w0.25: C21.2@233.5,964.5 234.502,963.498 243.498,963.498 C17.1@245,965
NetC18_1: C18.1 C22.2 C23.2 R20.2 | length 80.5
  Top Layer w0.25: C23.2@233.5,949.5 236.5,952.5 C22.2@236.5,957 237.388,957.888 v1(237.388,976.681) ; v1(244.932,979.983) 244.949,980 R20.2@247.5,980 248.36,980 249.862,981.502 249.862,988.519 251.401,990.058 251.401,1010.151 C18.1@257,1015.75
  Bottom Layer w0.25: v1(237.388,976.681) 240.69,979.983 v1(244.932,979.983)
NetC19_1: C19.1 C24.2 R21.2 | length 65.8
  Top Layer w0.25: C19.1@233.5,934.5 C24.2@233.5,942 ; v1(245.948,971.601) 245.948,971.804 246.644,972.5 R21.2@247.5,972.5
  Bottom Layer w0.25: C19.1@233.5,934.5 235.236,932.764 240.411,932.764 255.016,947.369 255.016,962.533 v1(245.948,971.601)
NetC20_2: C20.2 R22.2 | length 11.9
  Top Layer w0.25: v1(197,970) R22.2@202.5,970
  Bottom Layer w0.25: C20.2@192.5,965.5 v1(197,970)
NetC21_1: C21.1 U4.54 | length 15.8
  Top Layer w0.25: U4.54@231.775,976.528 231.775,974.795 230.562,973.582 230.562,969.071 235.133,964.5 C21.1@236.5,964.5
NetC22_1: C22.1 U4.49 | length 21.6
  Top Layer w0.25: U4.49@228.525,976.528 228.525,961.975 C22.1@233.5,957
NetC23_1: C23.1 U4.48 | length 37.2
  Top Layer w0.25: U4.48@227.875,976.528 227.875,949.517 229.743,947.649 234.649,947.649 C23.1@236.5,949.5
NetC24_1: C24.1 U4.43 | length 55.5
  Top Layer w0.25: v1(224.053,978.56) 224.625,977.989 U4.43@224.625,976.528
  Bottom Layer w0.25: v1(224.053,978.56) 232.613,970.001 232.613,968.756 232.105,968.248 225.958,968.248 223.114,965.403 223.114,955.386 C24.1@236.5,942
NetC27_2: C27.2 U4.58 | length 20.8
  Top Layer w0.25: v1(231.597,969.569) 234.375,972.347 U4.58@234.375,976.528
  Bottom Layer w0.25: C27.2@221,964.5 226.069,969.569 v1(231.597,969.569)
NetC29_2: C29.2 U4.37 | length 25.8
  Top Layer w0.25: v1(219.278,977.697) 219.956,978.374 219.956,979.898 220.082,980.025 U4.37@221.778,980.025
  Bottom Layer w0.25: v1(219.278,977.697) 219.278,958.722 C29.2@221,957
NetC49_2: C49.2 C52.1 D6.2 D7.2 U6.7 U6.8 ZD9.2 | length 72.3
  Top Layer w0.25: C52.1@181.25,875.75 181.25,872.25 C49.2@185.25,868.25 ; v1(187.604,842.061) 187.604,838.25 ZD9.2@187.75,838.25 ; U6.7@200.12,864.75 U6.8@200.12,867.29 200.91,866.5 D7.2@207.5,866.5 D6.2@207.5,871.5
  Bottom Layer w0.25: C49.2@185.25,868.25 199.16,868.25 U6.8@200.12,867.29 ; v1(187.604,842.061) 187.858,842.315 187.858,853.788 198.82,864.75 U6.7@200.12,864.75
NetC55_2: C55.2 R98.1 U7.46 | length 40.1
  Top Layer w0.25: v1(297.409,1013.104) 297.409,1011.779 297.688,1011.5 U7.46@298.7,1011.5 ; v1(303.2,1009.142) 304.013,1008.329 304.013,997.61 305.5,996.123 R98.1@305.5,995 305.5,993.439 303.936,991.875 v1(303.936,990.549)
  Bottom Layer w0.25: v1(297.409,1013.104) 301.371,1009.142 v1(303.2,1009.142) ; v1(303.936,990.549) 305.486,989 C55.2@313,989
NetC56_2: C56.2 R99.1 U7.44 | length 31
  Top Layer w0.25: U7.44@298.7,1010.2 299.72,1010.2 300.888,1009.032 300.888,1005.838 302.908,1003.818 302.908,997.457 v1(302.313,996.861) ; v1(305.029,998.423) 305.5,998.895 R99.1@305.5,1000
  Bottom Layer w0.25: v1(302.313,996.861) 305.029,996.861 v1(305.029,998.423) 307.452,996 C56.2@313,996
NetC61_2: C61.2 R108.1 U9.157 | length 95.3
  Top Layer w0.25: C61.2@325.95,980.85 331.394,986.294 331.394,995.02 334.547,998.173 340.381,998.173 343.713,994.842 343.713,984.428 344.602,983.717 ; R108.1@348.45,984.85 348.45,983.996 348.171,983.717 344.602,983.717 ; v1(356.514,970.737) 353.263,973.988 353.263,983.894 350.469,986.688 345.262,986.688 344.602,986.028 344.602,983.717 ; v1(372.796,970.483) 374.613,972.3 U9.157@376,972.3
  Bottom Layer w0.25: v1(356.514,970.737) 356.852,970.399 368.155,970.399 368.493,970.737 372.542,970.737 v1(372.796,970.483)
NetC63_2: C63.2 R109.1 U9.158 | length 76.9
  Top Layer w0.25: v1(340.442,993.85) 340.95,993.342 R109.1@340.95,984.85 340.95,983.488 341.814,982.624 v1(349.682,982.624) ; U9.158@376,971.65 377.215,971.65 377.493,971.372 379.271,971.372 379.703,971.804 379.703,974.549 v1(378.181,976.071)
  Bottom Layer w0.25: C63.2@325.95,993.85 v1(340.442,993.85) ; v1(349.682,982.624) 350.467,983.41 359.285,983.41 359.329,983.366 373.781,983.366 375.615,981.532 375.615,978.082 377.626,976.071 v1(378.181,976.071)
NetC90_2: C90.2 R169.2 U9.26 | length 37.4
  Top Layer w0.25: v1(394.564,950.366) 394.564,964.032 396.05,965.518 U9.26@396.05,966.55 ; C90.2@400.95,935.85 398.374,938.426 398.374,946.334 v1(399.39,947.35) R169.2@400.95,947.35
  Bottom Layer w0.25: v1(394.564,950.366) 396.373,950.366 v1(399.39,947.35)
NetC129_1: C129.1 R170.2 R173.2 U12.2 | length 93.8
  Top Layer w0.25: v1(290.932,920) R170.2@292.5,920 ; R173.2@300.5,927.5 v1(300.5,925.938) 300.5,923.265 302.387,921.378 302.387,895.887 C129.1@301.5,895
  Bottom Layer w0.25: v1(290.932,920) 290.932,932.688 292.151,933.907 298.806,933.907 300.5,932.213 v1(300.5,925.938) 300.824,926.262 323.818,926.262 U12.2@327.62,922.46
NetC132_1: C132.1 C133.1 L20.1 U12.5 U12.7 | length 52.1
  Top Layer w0.25: C132.1@298.5,912.5 C133.1@298.5,920 ; L20.1@310,928.5 319.04,928.5 U12.5@320,927.54 318.999,926.539 318.999,923.461 U12.7@320,922.46
  Bottom Layer w0.25: C133.1@298.5,920 296.901,921.599 296.901,923.036 297.409,923.544 298.679,923.544 300.812,921.41 318.95,921.41 U12.7@320,922.46
NetC159_2: C159.2 R183.2 U16.13 | length 24.1
  Top Layer w0.25: C159.2@391.9,855.2 391.9,855.939 394.4,858.439 R183.2@394.4,871.2 396.704,871.2 397.854,872.35 U16.13@400.95,872.35
NetC160_1: C160.1 R199.2 U16.7 ZQ1.2 | length 66.8
  Top Layer w0.25: ZQ1.2@406.84,884.2 406.84,880.885 406.7,880.745 U16.7@406.7,877.45 406.7,874.776 ; R199.2@414.4,841.7 413.39,841.7 411.988,843.102 411.988,865.708 407.174,870.523 407.174,873.391 406.7,873.864 406.7,874.776 ; C160.1@414.4,888.2 411.734,885.534 411.734,874.776 410.591,873.633 407.843,873.633 406.7,874.776
NetC161_1: C161.1 R199.1 U16.8 ZQ1.1 | length 144.7
  Top Layer w0.25: ZQ1.1@401.96,884.2 406.05,880.11 U16.8@406.05,877.45 ; R199.1@414.4,844.7 v1(418.615,844.7)
  Bottom Layer w0.25: ZQ1.1@401.96,884.2 401.045,883.285 388.112,883.285 387.604,883.793 387.604,884.961 390.843,888.2 C161.1@394.4,888.2 391.008,891.592 391.008,898.144 392.074,899.211 424.917,899.211 430.936,893.191 430.936,857.021 v1(418.615,844.7)
NetC162_2: C162.2 R184.2 U16.14 | length 86.2
  Top Layer w0.25: R184.2@374.4,869.2 374.4,864.768 375.92,863.248 375.92,858.266 378.986,855.2 C162.2@384.4,855.2 ; U16.14@400.95,871.7 401.599,871.7 401.831,871.931 403.581,871.931 404.647,870.864 v1(404.647,868.832)
  Bottom Layer w0.25: C162.2@384.4,855.2 383.515,856.085 383.515,858.901 384.744,860.131 404.537,860.131 405.384,859.284 414.352,859.284 416.585,861.517 416.585,868.045 416.052,868.578 415.569,868.578 414.18,869.968 405.783,869.968 v1(404.647,868.832)
NetC163_1: C163.1 C165.2 C167.2 R198.1 R200.1 R201.1 U16.18 | length 174.8
  Top Layer w0.25: v1(325.526,851.002) 325.528,851 C163.1@327.5,851 ; v1(384.124,862.686) 384.4,862.961 R201.1@384.4,864.2 R200.1@384.4,871.7 R198.1@384.4,879.2 ; C165.2@399.4,858.2 399.4,868.298 400.202,869.1 U16.18@400.95,869.1 403.352,869.1 403.426,869.026 403.426,867.158 v1(404.393,866.191)
  Bottom Layer w0.25: v1(325.526,851.002) 353.949,851.002 359.181,845.769 361.747,845.769 363.677,847.7 372.923,847.7 374.646,845.976 396.955,845.976 400.812,849.833 400.812,856.788 C165.2@399.4,858.2 403.149,858.2 403.259,858.09 404.923,858.09 405.033,858.2 C167.2@406.9,858.2 ; v1(384.124,862.686) 385.343,863.905 387.655,863.905 388.214,863.346 407.594,863.346 409.372,861.568 411.48,861.568 411.988,862.076 411.988,865.632 410.921,866.699 404.901,866.699 v1(404.393,866.191)
NetC164_1: C164.1 R195.1 U16.4 | length 57.4
  Top Layer w0.25: R195.1@389.4,909.2 389.4,906.678 392.887,903.191 392.887,898.687 C164.1@391.9,897.7 ; v1(408.407,878.738) 408.65,878.495 U16.4@408.65,877.45
  Bottom Layer w0.25: C164.1@391.9,897.7 398.644,890.956 410.185,890.956 415.29,885.85 415.29,879.196 414.045,877.951 409.194,877.951 v1(408.407,878.738)
NetC166_1: C166.1 R194.1 U16.3 | length 37.4
  Top Layer w0.25: R194.1@398.9,909.2 398.9,905.593 400.304,904.189 400.304,898.604 ; C166.1@399.4,897.7 400.304,898.604 ; U16.3@409.3,877.45 409.3,878.053 409.423,878.175 409.423,884.707 400.304,893.826 400.304,898.604
NetC167_1: C167.1 D8.2 R205.2 U16.19 | length 136.1
  Top Layer w0.25: R205.2@315,841 317.062,841 v1(321.463,845.4) D8.2@322.5,845.4 ; U16.19@400.95,868.45 402.238,868.45 402.895,867.793 402.895,846.328 403.352,845.871 405.536,845.871 405.536,853.836 C167.1@406.9,855.2
  Bottom Layer w0.25: v1(321.463,845.4) 322.542,844.321 364.213,844.321 365.069,845.178 396.878,845.178 C167.1@406.9,855.2
NetC168_1: C168.1 R193.1 U16.2 | length 33.8
  Top Layer w0.25: R193.1@406.9,909.2 406.9,905.416 407.797,904.519 407.797,898.597 C168.1@406.9,897.7 409.95,894.65 U16.2@409.95,877.45
NetC170_1: C170.1 R208.2 VT1.1 | length 45.4
  Top Layer w0.25: VT1.1@359.4,891.7 359.4,899.15 v1(361.086,900.836) ; R208.2@384.4,886.7 C170.1@384.4,897.7
  Bottom Layer w0.25: v1(361.086,900.836) 381.264,900.836 C170.1@384.4,897.7
NetJ1_10: J1.10 U13.37 | length 2
  Top Layer w0.25: v1(507.988,940) J1.10@510,940
NetJ1_11: J1.11 U13.38 | length 11.9
  Top Layer w0.25: U13.38@500,947 501.066,947 505.566,942.5 J1.11@510,942.5
NetJ1_12: J1.12 U13.39 | length 2
  Top Layer w0.25: v1(507.988,945) J1.12@510,945
NetJ1_13: J1.13 U13.40 | length 10.2
  Top Layer w0.25: U13.40@500,948 504.749,948 505.249,947.5 J1.13@510,947.5
NetJ1_14: J1.14 U13.41 | length 2
  Top Layer w0.25: v1(507.988,950) J1.14@510,950
NetJ1_15: J1.15 U13.42 | length 11.4
  Top Layer w0.25: U13.42@500,949 504.647,949 508.147,952.5 J1.15@510,952.5
NetJ1_16: J1.16 U13.45 | length 2
  Top Layer w0.25: v1(507.988,955) J1.16@510,955
NetJ1_17: J1.17 U13.46 | length 12.7
  Top Layer w0.25: U13.46@500,951 501.853,951 508.353,957.5 J1.17@510,957.5
NetJ1_18: J1.18 U13.47 | length 2
  Top Layer w0.25: v1(507.988,960) J1.18@510,960
NetJ1_19: J1.19 U13.48 | length 16.5
  Top Layer w0.25: U13.48@500,952 501.218,952 505.866,956.648 505.866,960.257 508.109,962.5 J1.19@510,962.5
NetJ1_20: J1.20 U14.37 | length 2
  Top Layer w0.25: v1(507.988,965) J1.20@510,965
NetJ1_21: J1.21 U14.38 | length 14.3
  Top Layer w0.25: U14.38@500,974.5 503.428,974.5 506.908,971.02 506.908,968.592 508,967.5 J1.21@510,967.5
NetJ1_22: J1.22 U14.39 | length 7.4
  Top Layer w0.25: U14.39@500,975 500.939,975 501.109,974.83 502.73,974.83 v1(504.56,973) ; v1(507.988,970) J1.22@510,970
NetJ1_23: J1.23 U14.40 | length 2
  Top Layer w0.25: J1.23@510,972.5 v1(512.012,972.5)
NetJ1_24: J1.24 U14.41 | length 10.4
  Top Layer w0.25: U14.41@500,976 v1(502.158,976) ; v1(507.056,975) J1.24@510,975
  Bottom Layer w0.25: v1(502.158,976) 503.158,975 v1(507.056,975)
NetJ1_25: J1.25 U14.42 | length 2
  Top Layer w0.25: J1.25@510,977.5 v1(512.012,977.5)
NetJ1_26: J1.26 U14.45 | length 10.9
  Top Layer w0.25: U14.45@500,978 501.015,978 501.09,977.925 506.984,977.925 509.059,980 J1.26@510,980
NetJ1_27: J1.27 U14.46 | length 2
  Top Layer w0.25: J1.27@510,982.5 v1(512.012,982.5)
NetJ1_28: J1.28 U14.47 | length 12.5
  Top Layer w0.25: U14.47@500,979 v1(501.539,979) ; v1(507.539,985) J1.28@510,985
  Bottom Layer w0.25: v1(501.539,979) v1(507.539,985)
NetJ1_29: J1.29 U14.48 | length 2
  Top Layer w0.25: J1.29@510,987.5 v1(512.012,987.5)
NetL2_2: L2.2 R9.1 ZD3.2 | length 43.8
  Top Layer w0.25: L2.2@177.5,937 177.5,934.283 178.816,932.967 190.58,932.967 191.211,933.599 191.211,942.848 192.278,943.915 193.675,943.915 194.742,942.848 194.742,936.142 ZD3.2@193.1,934.5 R9.1@197,934.5
NetL3_2: L3.2 R10.1 ZD5.2 | length 37.8
  Top Layer w0.25: L3.2@177.5,927 180.579,923.921 191.421,923.921 R10.1@197,929.5 192.43,934.07 192.43,939.216 193.1,939.885 ZD5.2@193.1,942
NetL4_2: L4.2 R15.2 R19.1 | length 66.6
  Top Layer w0.25: L4.2@195.5,1002 195.5,1001.924 198.925,1001.924 199.001,1002 R15.2@202.5,1002 201.371,1001.695 v1(201.371,995.932) ; v1(245.948,988.009) 245.957,988 R19.1@247.5,988
  Bottom Layer w0.25: v1(201.371,995.932) 210.085,987.218 227.327,987.218 230.39,984.155 233.866,984.155 237.721,988.009 v1(245.948,988.009)
NetL5_2: L5.2 R16.2 R20.1 | length 58.2
  Top Layer w0.25: L5.2@195.5,992 R16.2@202.5,992 202.641,992 v1(202.641,993.216) ; v1(245.948,983.513) 246.462,983 R20.1@247.5,983
  Bottom Layer w0.25: v1(202.641,993.216) 209.144,986.714 225.451,986.714 228.955,983.211 236.499,983.211 237.386,984.098 244.424,984.098 245.008,983.513 v1(245.948,983.513)